# Altium PCB Sitara_Project_Rev_A.PcbDoc (part 5 of 5)
Units mm, origin at the board's own origin, x right, y up, seen from the top; angles counter-clockwise.
Board outline 120 x 85 mm, 8 copper layers (L1 (Sig), L2 (GND), L3 (PWR), L4 (Sig), L5 (GND), L6 (Sig), L7 (GND), L8 (Sig)), stack 1.188 mm thick; 515 components, 404 nets, 2043 pads, 82 vias.
Unrouted connection lines stored in the file: 1274.
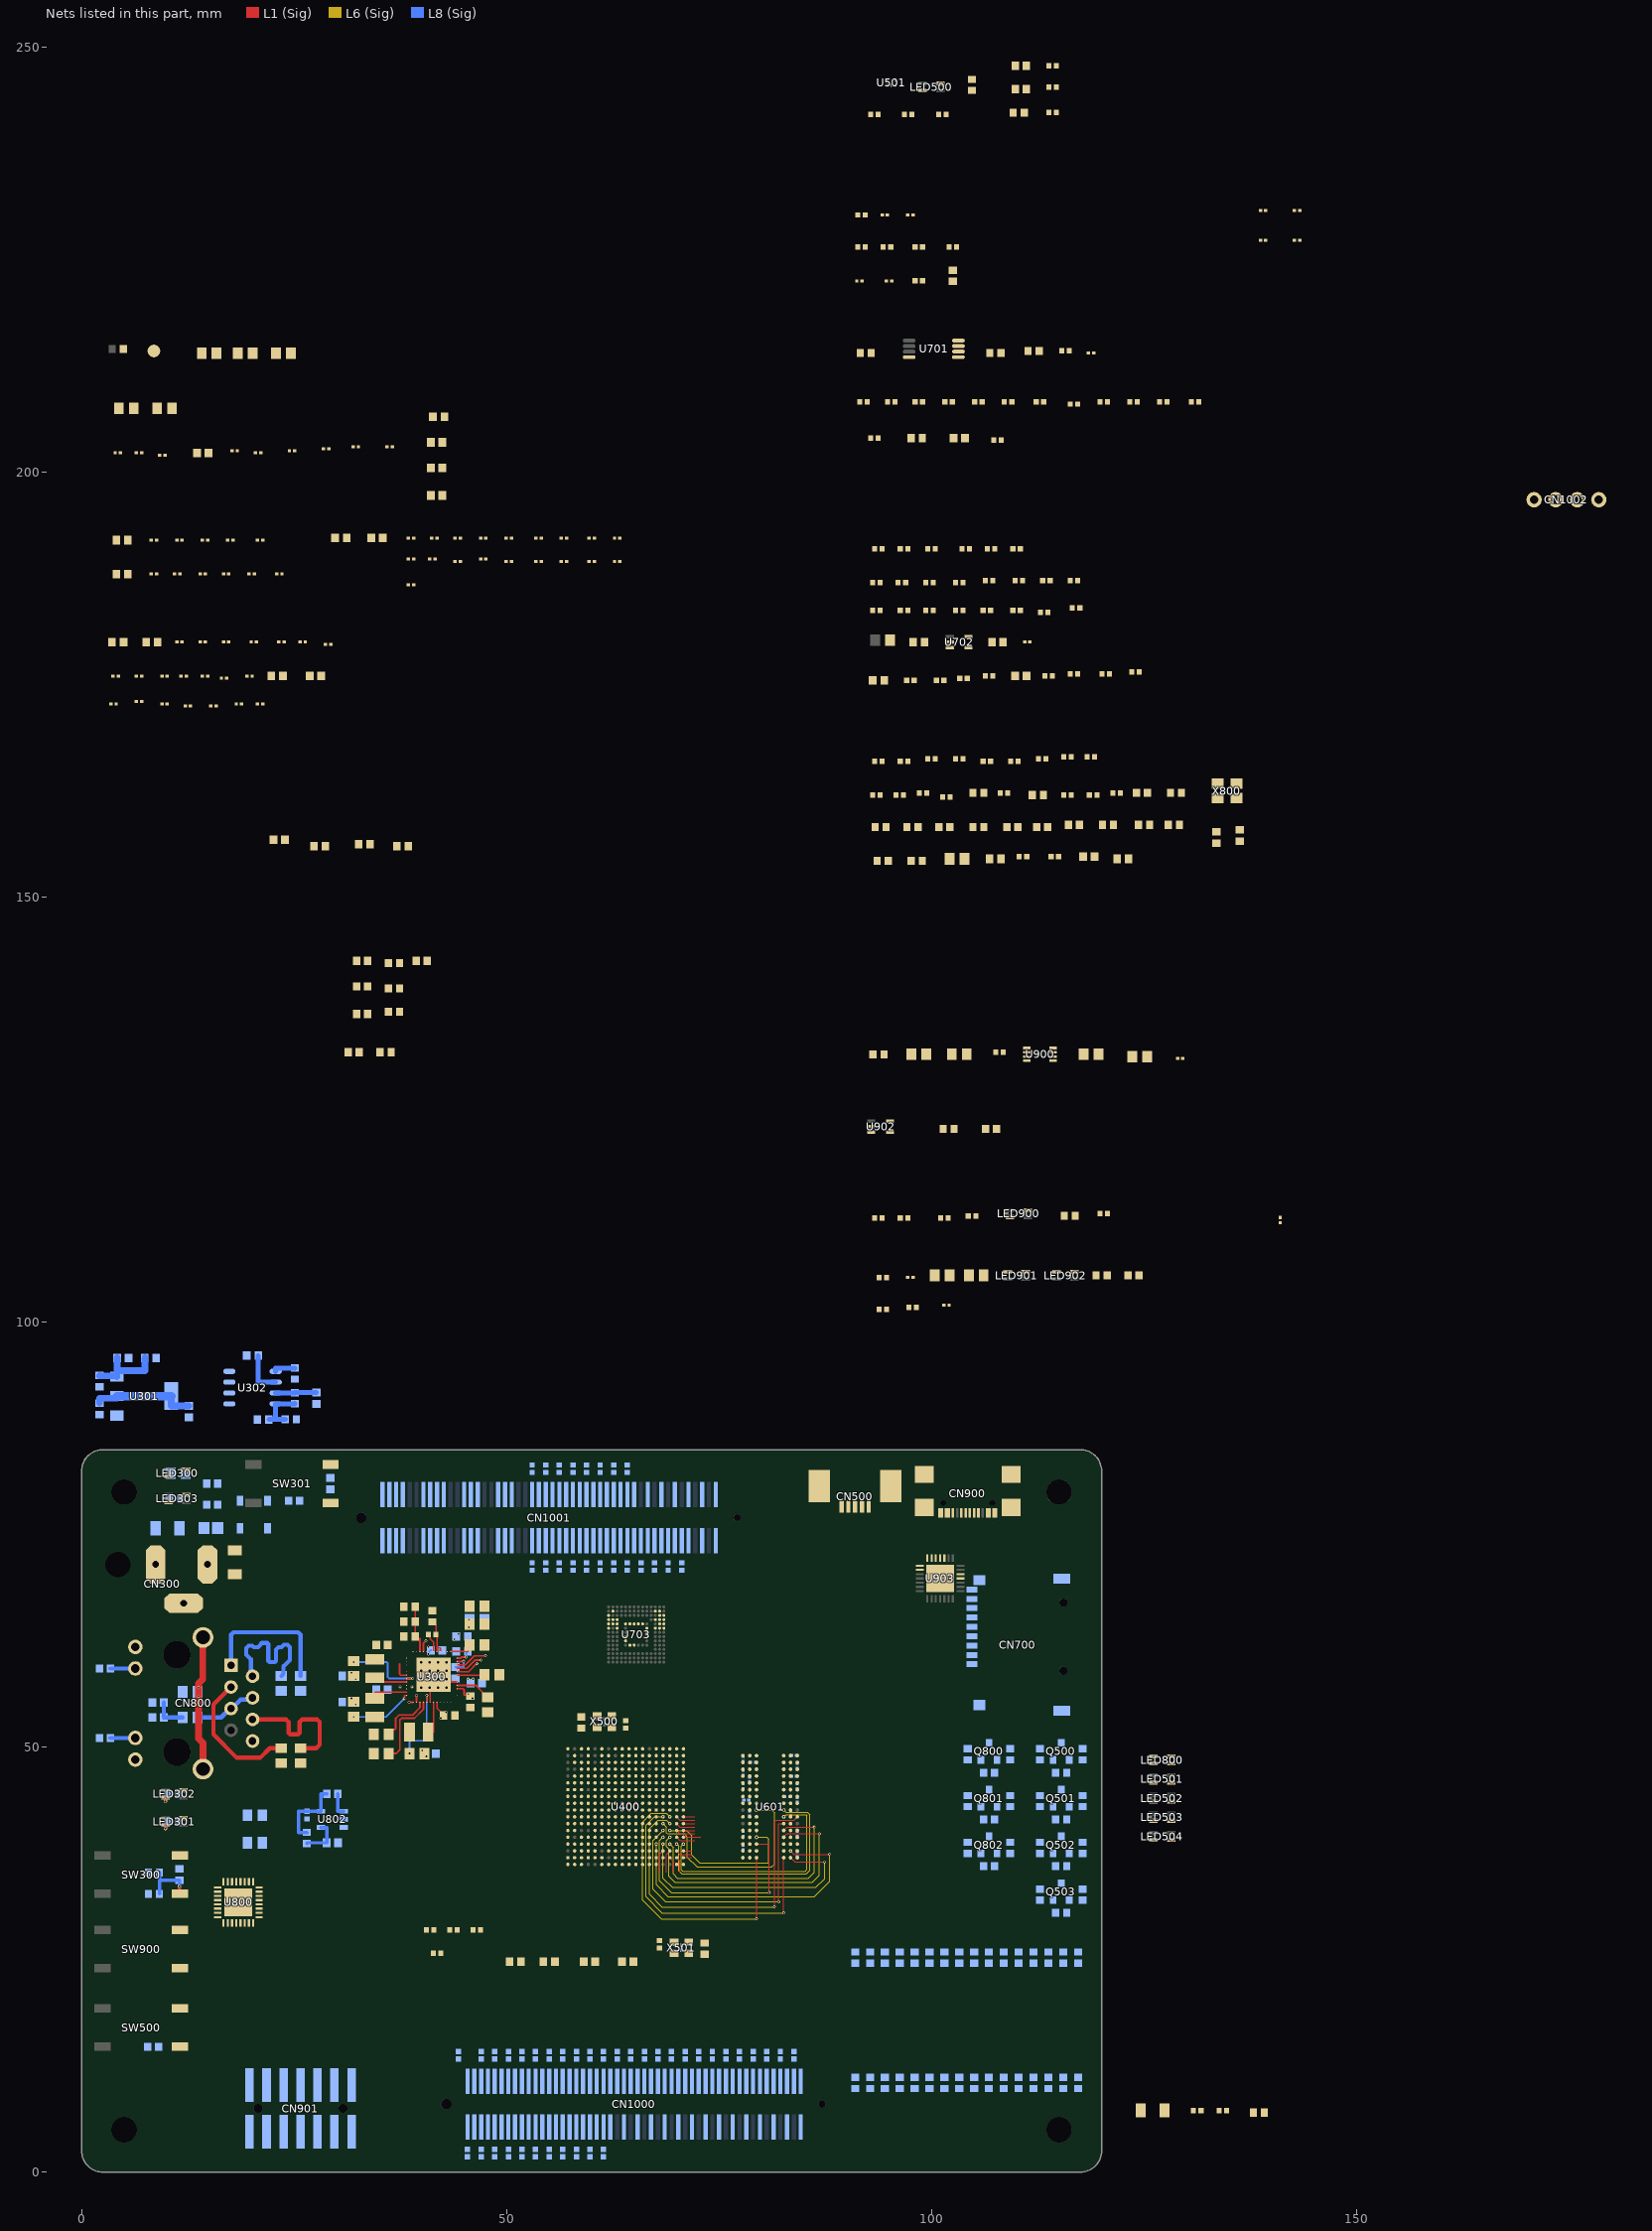
[diagram p5: the nets of this part, all layers, seen from the top]

## Silkscreen, mask and mechanical layers (free items; w line width, h text height) (continued)
Bottom Overlay: (continued)
  text "MIC" at 18.25,41.25 h1.52
  text "AMS" at 18.25,38 h1.52
  text "BOOT15" at 90.25,15.883 h1.52 r270
  text "BOOT0" at 116.5,15.883 h1.52 r270

## Text inside footprints (layer, text, board x,y; h text height)
LED300: Mechanical 13 "G" at 13.001,82.491 h0.5; Mechanical 13 "B" at 13.016,81.691 h0.5; Mechanical 13 "+" at 9.339,81.693 h0.5; Mechanical 13 "R" at 9.307,82.491 h0.5
LED301: Mechanical 13 "R" at 12.843,41.009 h0.5 r180; Mechanical 13 "+" at 12.811,41.807 h0.5 r180; Mechanical 13 "B" at 9.134,41.809 h0.5 r180; Mechanical 13 "G" at 9.149,41.009 h0.5 r180
LED302: Mechanical 13 "R" at 12.843,44.259 h0.5 r180; Mechanical 13 "+" at 12.811,45.057 h0.5 r180; Mechanical 13 "B" at 9.134,45.059 h0.5 r180; Mechanical 13 "G" at 9.149,44.259 h0.5 r180
LED303: Mechanical 13 "G" at 13.001,79.491 h0.5; Mechanical 13 "B" at 13.016,78.691 h0.5; Mechanical 13 "+" at 9.339,78.693 h0.5; Mechanical 13 "R" at 9.307,79.491 h0.5
LED500: Mechanical 13 "R" at 101.943,245.059 h0.5 r180; Mechanical 13 "+" at 101.911,245.857 h0.5 r180; Mechanical 13 "B" at 98.234,245.859 h0.5 r180; Mechanical 13 "G" at 98.249,245.059 h0.5 r180
LED501: Mechanical 13 "B" at 128.891,45.691 h0.5; Mechanical 13 "G" at 128.876,46.491 h0.5; Mechanical 13 "+" at 125.214,45.693 h0.5; Mechanical 13 "R" at 125.182,46.491 h0.5
LED502: Mechanical 13 "B" at 128.891,43.441 h0.5; Mechanical 13 "G" at 128.876,44.241 h0.5; Mechanical 13 "+" at 125.214,43.443 h0.5; Mechanical 13 "R" at 125.182,44.241 h0.5
LED503: Mechanical 13 "B" at 128.891,41.191 h0.5; Mechanical 13 "G" at 128.876,41.991 h0.5; Mechanical 13 "+" at 125.214,41.193 h0.5; Mechanical 13 "R" at 125.182,41.991 h0.5
LED504: Mechanical 13 "B" at 128.891,38.941 h0.5; Mechanical 13 "G" at 128.876,39.741 h0.5; Mechanical 13 "+" at 125.214,38.943 h0.5; Mechanical 13 "R" at 125.182,39.741 h0.5
LED800: Mechanical 13 "R" at 125.182,48.741 h0.5; Mechanical 13 "+" at 125.214,47.943 h0.5; Mechanical 13 "G" at 128.876,48.741 h0.5; Mechanical 13 "B" at 128.891,47.941 h0.5
LED900: Mechanical 13 "R" at 112.193,112.509 h0.5 r180; Mechanical 13 "+" at 112.161,113.307 h0.5 r180; Mechanical 13 "B" at 108.484,113.309 h0.5 r180; Mechanical 13 "G" at 108.499,112.509 h0.5 r180
LED901: Mechanical 13 "R" at 111.943,105.259 h0.5 r180; Mechanical 13 "+" at 111.911,106.057 h0.5 r180; Mechanical 13 "G" at 108.249,105.259 h0.5 r180; Mechanical 13 "B" at 108.234,106.059 h0.5 r180
LED902: Mechanical 13 "R" at 117.693,105.259 h0.5 r180; Mechanical 13 "+" at 117.661,106.057 h0.5 r180; Mechanical 13 "G" at 113.999,105.259 h0.5 r180; Mechanical 13 "B" at 113.984,106.059 h0.5 r180